# EAGLE board Nusbio.smd (EAGLE 7.4.0)
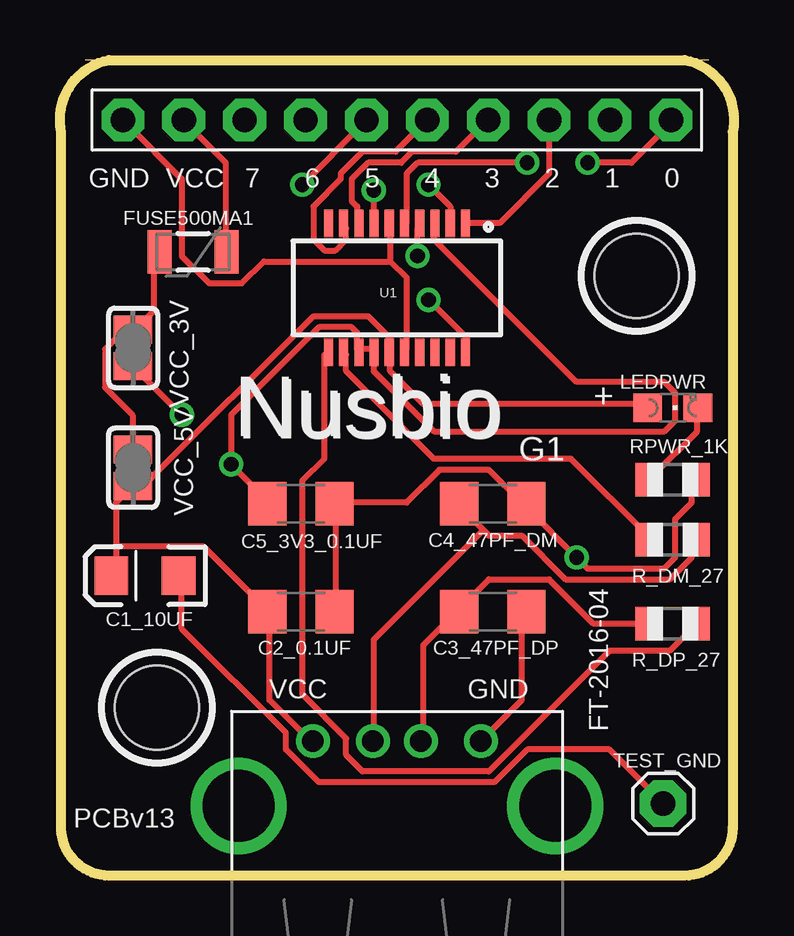
[diagram p0: board, top side]
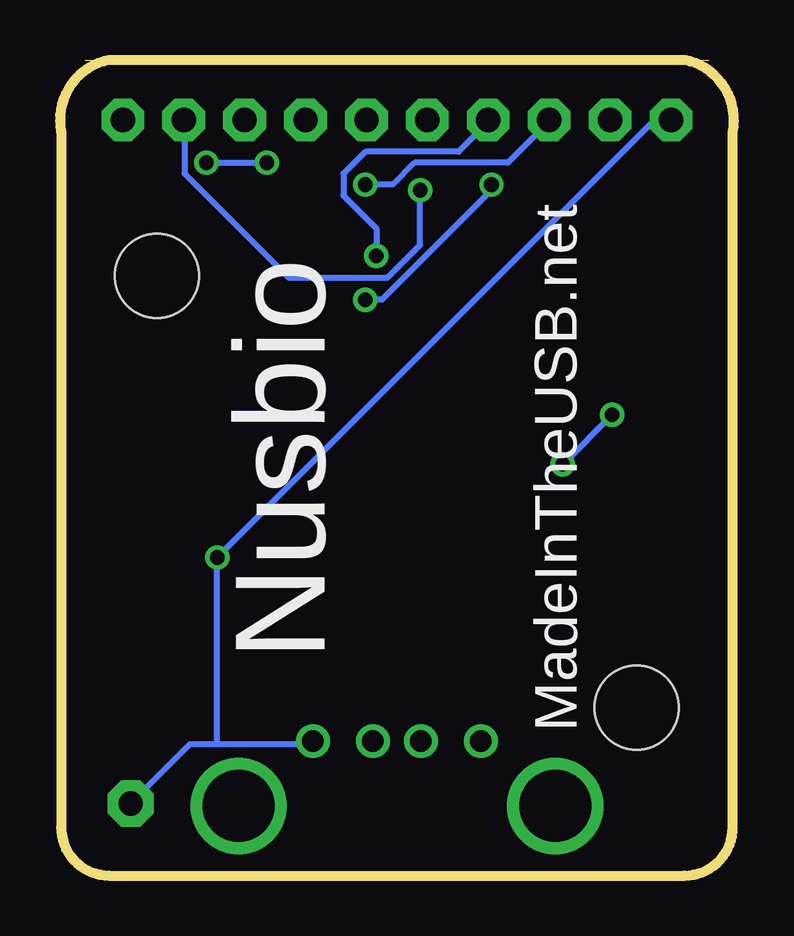
[diagram p1: board, bottom side, seen from below]

Size 28.1 x 34 mm. Coordinates in mm from the lower left corner, seen from the top.
Outline: 27.05,34 1.05,34
Outline: 2.05,0 arc-90 0.05,2 0.05,31 arc-90 2.05,34 26.05,34 arc-90 28.05,31 28.05,2 arc-90 26.05,0 2.05,0
Copper layers (1*16): Top 0.035mm / dielectric 1.5mm / Bottom 0.035mm
Design rules "default": minimum track width 10mil, minimum drill 24mil, track to track 8mil, track to pad 8mil, pad to pad 8mil, via to via 8mil, smd to smd 8mil, copper to edge 40mil, drill to drill 8mil, minimum pad ring 10mil, minimum via ring 8mil, stop-mask expansion 4mil, vias tented up to drill 0mil, thermal gap 10mil
Holes 3.5 mm at 4.05,7 24.05,25

## Footprints (pad centres in the part's own frame; a part is rotated, then mirrored left to right if it is on the bottom)
EIA3216 = smd 1.4 x 1.6: A 1.4,0; C -1.4,0
C1206 = smd 1.6 x 1.8: 1 -1.4,0; 2 1.4,0
PTC-1206 = smd 1 x 1.8: 1 -1.4,0; 2 1.4,0
CHIPLED_0805 = smd 1.2 x 1.2: A 0,-1.05; C 0,1.05
R0805 = smd 1.1 x 1.4: 1 -1,0; 2 1,0
1X01 = drill 1.016 pad 1.93 octagon: 1 0,0
SSOP20_L = smd 0.381 x 1.143: 1 -2.857,-2.68; 2 -2.223,-2.68; 3 -1.587,-2.68; 4 -0.953,-2.68; 5 -0.318,-2.68; 6 0.318,-2.68; 7 0.953,-2.68; 8 1.587,-2.68; 9 2.223,-2.68; 10 2.857,-2.68; 11 2.857,2.68; 12 2.223,2.68; 13 1.587,2.68; 14 0.953,2.68; 15 0.318,2.68; 16 -0.318,2.68; 17 -0.953,2.68; 18 -1.587,2.68; 19 -2.223,2.68; 20 -2.857,2.68
1X10-BIG = drill 1.016 pad 1.778 octagon: 1 -11.43,0; 2 -8.89,0; 3 -6.35,0; 4 -3.81,0; 5 -1.27,0; 6 1.27,0; 7 3.81,0; 8 6.35,0; 9 8.89,0; 10 11.43,0
USB-FEMALE-A-PTH = drill 0.9: D+ 5.9,1.3; D- 7.9,1.3; GND 3.4,1.3; VBUS 10.4,1.3 | drill 3: GND@1 13.5,4; GND@2 0.3,4
SOLDERJUMPER_REFLOW = smd 1.168 x 1.6: 1 -0.762,0; 2 0.762,0

## Placement (x,y rotation side)
C1_10UF  10uF  [EIA3216]  3.55,12.5 180 top
C2_0.1UF  [C1206]  10.05,11 0 top
C3_47PF_DP  [C1206]  18.05,11 180 top
C4_47PF_DM  [C1206]  18.05,15.5 180 top
C5_3V3_0.1UF  [C1206]  10.05,15.5 0 top
FUSE500MA1  PTCSMD  [PTC-1206]  5.55,26 180 top
LEDPWR  [CHIPLED_0805]  25.55,19.5 270 top
R_DM_27  [R0805]  25.55,14 180 top
R_DP_27  [R0805]  25.55,10.5 0 top
RPWR_1K  [R0805]  25.55,16.5 0 top
TEST_GND  [1X01]  25.15,3 0 top
U1  FTS31XS-U  [SSOP20_L]  14.05,24.5 180 top
U$1  PINHD-1X10  [1X10-BIG]  14.05,31.5 180 top
USB_FEMALE  USB  [USB-FEMALE-A-PTH]  20.95,6.9 180 top
VCC_3V  [SOLDERJUMPER_REFLOW]  3.05,22 270 top
VCC_5V  [SOLDERJUMPER_REFLOW]  3.05,17 90 top

## Library data of the parts
C1_10UF = SparkFun-Capacitors; PROD_ID: CAP-00811
C2_0.1UF C3_47PF_DP C4_47PF_DM C5_3V3_0.1UF LEDPWR R_DM_27 R_DP_27 RPWR_1K TEST_GND U$1 = adafruit
FUSE500MA1 = SparkFun-PowerIC; PROD_ID: RES-11150
U1 = SparkFun-DigitalIC; PROD_ID: IC-11524
USB_FEMALE = STUNTAZ
VCC_3V VCC_5V = microbuilder

## Nets
3V3: C5_3V3_0.1UF.1 U1.3 U1.13 U1.14 VCC_3V.2
GND: C1_10UF.C C2_0.1UF.2 C3_47PF_DP.1 C4_47PF_DM.1 C5_3V3_0.1UF.2 RPWR_1K.2 TEST_GND.1 U1.6 U1.16 U$1.10 USB_FEMALE.GND
GPIO0: U1.5 U$1.1
GPIO1: U1.7 U$1.2
GPIO2: U1.1 U$1.3
GPIO3: U1.8 U$1.4
GPIO4: U1.9 U$1.5
GPIO5: U1.20 U$1.6
GPIO6: U1.4 U$1.7
GPIO7: U1.2 U$1.8
N$3: LEDPWR.C RPWR_1K.1
N$4: R_DM_27.2 U1.12
N$5: R_DP_27.2 U1.11
N$15: C3_47PF_DP.2 R_DP_27.1 USB_FEMALE.D+
N$16: C4_47PF_DM.2 R_DM_27.1 USB_FEMALE.D-
N$17: FUSE500MA1.2 VCC_3V.1 VCC_5V.2
NUSBIO_VCC: FUSE500MA1.1 U$1.9
VBUS_IN: C1_10UF.A C2_0.1UF.1 LEDPWR.A U1.15 USB_FEMALE.VBUS VCC_5V.1

## Tracks (layer width: path | path; a pad name or v marks a point on that pad's centre or on a via)
3V3  (via drill 0.61)
  Top 0.254: v5.08,19.2 3.25,21.03 VCC_3V.2 | C5_3V3_0.1UF.1 8.74,15.54 v7.14,17.14 7.14,19.2 10.79,22.86 12.17,22.86 12.39,22.63 12.39,21.95 U1.13 12.62,21.95 13.08,21.95 U1.14 13.08,21.72 13.08,21.03 15.59,18.52 25.2,18.52 25.65,18.97 25.65,20.12 25.2,20.57 21.54,20.57 15.59,26.52 15.59,26.98 U1.3
  Bottom 0.254: v7.14,17.14 v5.08,19.2
GND  (via drill 0.61)
  Top 0.254: 13.77,25.6 14.45,24.92 14.45,21.95 U1.16 | 13.77,25.6 13.77,26.98 U1.6 | 13.77,25.6 8.51,25.6 7.59,24.69 6.22,24.69 5.08,25.83 5.08,29.03 2.79,31.32 U$1.10 | C2_0.1UF.2 11.48,11.2 11.48,15.32 C5_3V3_0.1UF.2 11.48,15.54 14.45,15.54 15.82,16.92 17.88,16.92 19.25,15.54 C4_47PF_DM.1 19.48,15.32 v21.54,13.26 22,12.8 25.2,12.8 25.65,13.26 25.65,14.86 26.34,15.54 26.34,16.46 RPWR_1K.2 | C3_47PF_DP.1 19.25,10.97 19.25,7.32 17.65,5.71 USB_FEMALE.GND | C1_10UF.C 5.08,12.34 5.08,10.29 9.42,5.94 9.42,5.26 10.79,3.89 18.11,3.89 19.48,5.26 22.91,5.26 24.97,3.2 TEST_GND.1
  Bottom 0.254: 21.54,5.49 22.68,5.49 24.97,3.2 TEST_GND.1 | 21.54,5.49 17.65,5.49 USB_FEMALE.GND | 21.54,5.49 v21.54,13.26 3.48,31.32 2.79,31.32 U$1.10
GPIO0  (via drill 0.61)
  Top 0.254: v19.48,29.72 14.91,29.72 14.45,29.26 14.45,27.2 U1.5 | v22,29.72 23.82,29.72 25.42,31.32 U$1.1
  Bottom 0.254: v22,29.72 v19.48,29.72
GPIO1  (via drill 0.61)
  Top 0.254: v13.08,28.57 13.08,27.2 U1.7
  Bottom 0.254: v13.08,28.57 13.08,26.29 14.45,24.92 18.57,24.92 22.91,29.26 22.91,31.32 U$1.2
GPIO2
  Top 0.254: U1.1 16.97,27.2 18.34,27.2 20.39,29.26 20.39,31.32 U$1.3
GPIO3
  Top 0.254: U1.8 12.39,27.2 12.39,27.89 12.17,28.12 12.17,29.03 12.85,29.72 14.22,29.72 14.68,30.18 16.51,30.18 17.65,31.32 U$1.4
GPIO4
  Top 0.254: U1.9 11.94,26.98 11.94,26.52 11.48,26.06 11.02,26.06 10.57,26.52 10.57,27.89 11.71,29.03 11.71,29.26 12.62,30.18 13.99,30.18 15.14,31.32 U$1.5
GPIO5  (via drill 0.61)
  Top 0.254: v15.37,24 16.97,22.4 16.97,21.95 U1.20 | v10.11,28.8 12.62,31.32 U$1.6
  Bottom 0.254: v15.37,24 14.68,24 10.11,28.57 v10.11,28.8
GPIO6  (via drill 0.61)
  Top 0.254: v14.91,25.83 14.91,26.98 U1.4
  Bottom 0.254: v14.91,25.83 14.91,26.98 16.28,28.35 16.28,29.26 15.37,30.18 11.48,30.18 10.34,31.32 U$1.7
GPIO7  (via drill 0.61)
  Top 0.254: v15.37,28.8 16.28,27.89 16.28,27.2 U1.2
  Bottom 0.254: v15.37,28.8 14.22,28.8 13.31,29.72 9.42,29.72 7.82,31.32 U$1.8
N$3
  Top 0.254: LEDPWR.C 26.57,19.43 26.57,18.52 24.74,16.69 RPWR_1K.1
N$4
  Top 0.254: U1.12 11.94,21.72 11.94,21.03 15.59,17.37 21.31,17.37 24.51,14.17 R_DM_27.2
N$5
  Top 0.254: U1.11 11.02,21.72 11.02,17.37 10.11,16.46 10.11,7.54 11.94,5.71 11.94,5.03 12.62,4.34 17.88,4.34 22.91,9.37 25.42,9.37 26.34,10.29 R_DP_27.2
N$15
  Top 0.254: R_DP_27.1 24.51,10.52 22.22,10.52 20.39,12.34 17.88,12.34 16.74,11.2 C3_47PF_DP.2 16.51,10.97 15.14,9.6 15.14,5.71 USB_FEMALE.D+
N$16
  Top 0.254: 17.65,14.4 16.74,15.32 C4_47PF_DM.2 | 17.65,14.4 17.88,14.17 19.25,14.17 21.08,12.34 25.42,12.34 26.34,13.26 26.34,13.95 R_DM_27.1 | 17.65,14.4 13.08,9.83 13.08,5.71 USB_FEMALE.D-
N$17
  Top 0.254: VCC_5V.2 3.02,17.83 3.02,19.2 1.88,20.34 1.88,21.95 2.56,22.63 3.02,22.63 VCC_3V.1 3.25,22.86 3.94,23.55 3.94,25.83 FUSE500MA1.2
NUSBIO_VCC
  Top 0.254: FUSE500MA1.1 6.91,26.06 6.91,29.72 5.31,31.32 U$1.9
VBUS_IN
  Top 0.254: LEDPWR.A 24.28,19.66 15.14,19.66 13.77,21.03 13.77,21.72 U1.15 13.77,21.95 13.77,22.4 12.85,23.32 10.57,23.32 3.71,16.46 3.25,16.46 VCC_5V.1 3.02,16.23 2.34,15.54 2.34,13.72 | 2.34,13.72 2.34,12.57 C1_10UF.A | USB_FEMALE.VBUS 10.34,5.71 8.74,7.32 8.74,10.97 C2_0.1UF.1 8.51,11.2 5.99,13.72 2.34,13.72

## Text on the board
tNames: GND | VCC | 7 | 6 | 5 | 4 | 3 | 2 | 1 | 0 | + | Nusbio | Nusbio | G1 | VCC | GND | FT-2016-04 | PCBv13
bNames: Nusbio | MadeInTheUSB.net